# Altium PCB HVBoard_PCB.PcbDoc
Units mm, origin at the board's own origin, x right, y up, seen from the top; angles counter-clockwise.
Board outline 87.12 x 113.79 mm, 2 copper layers (Top Layer, Bottom Layer); 70 components, 37 nets, 201 pads, 10 vias.
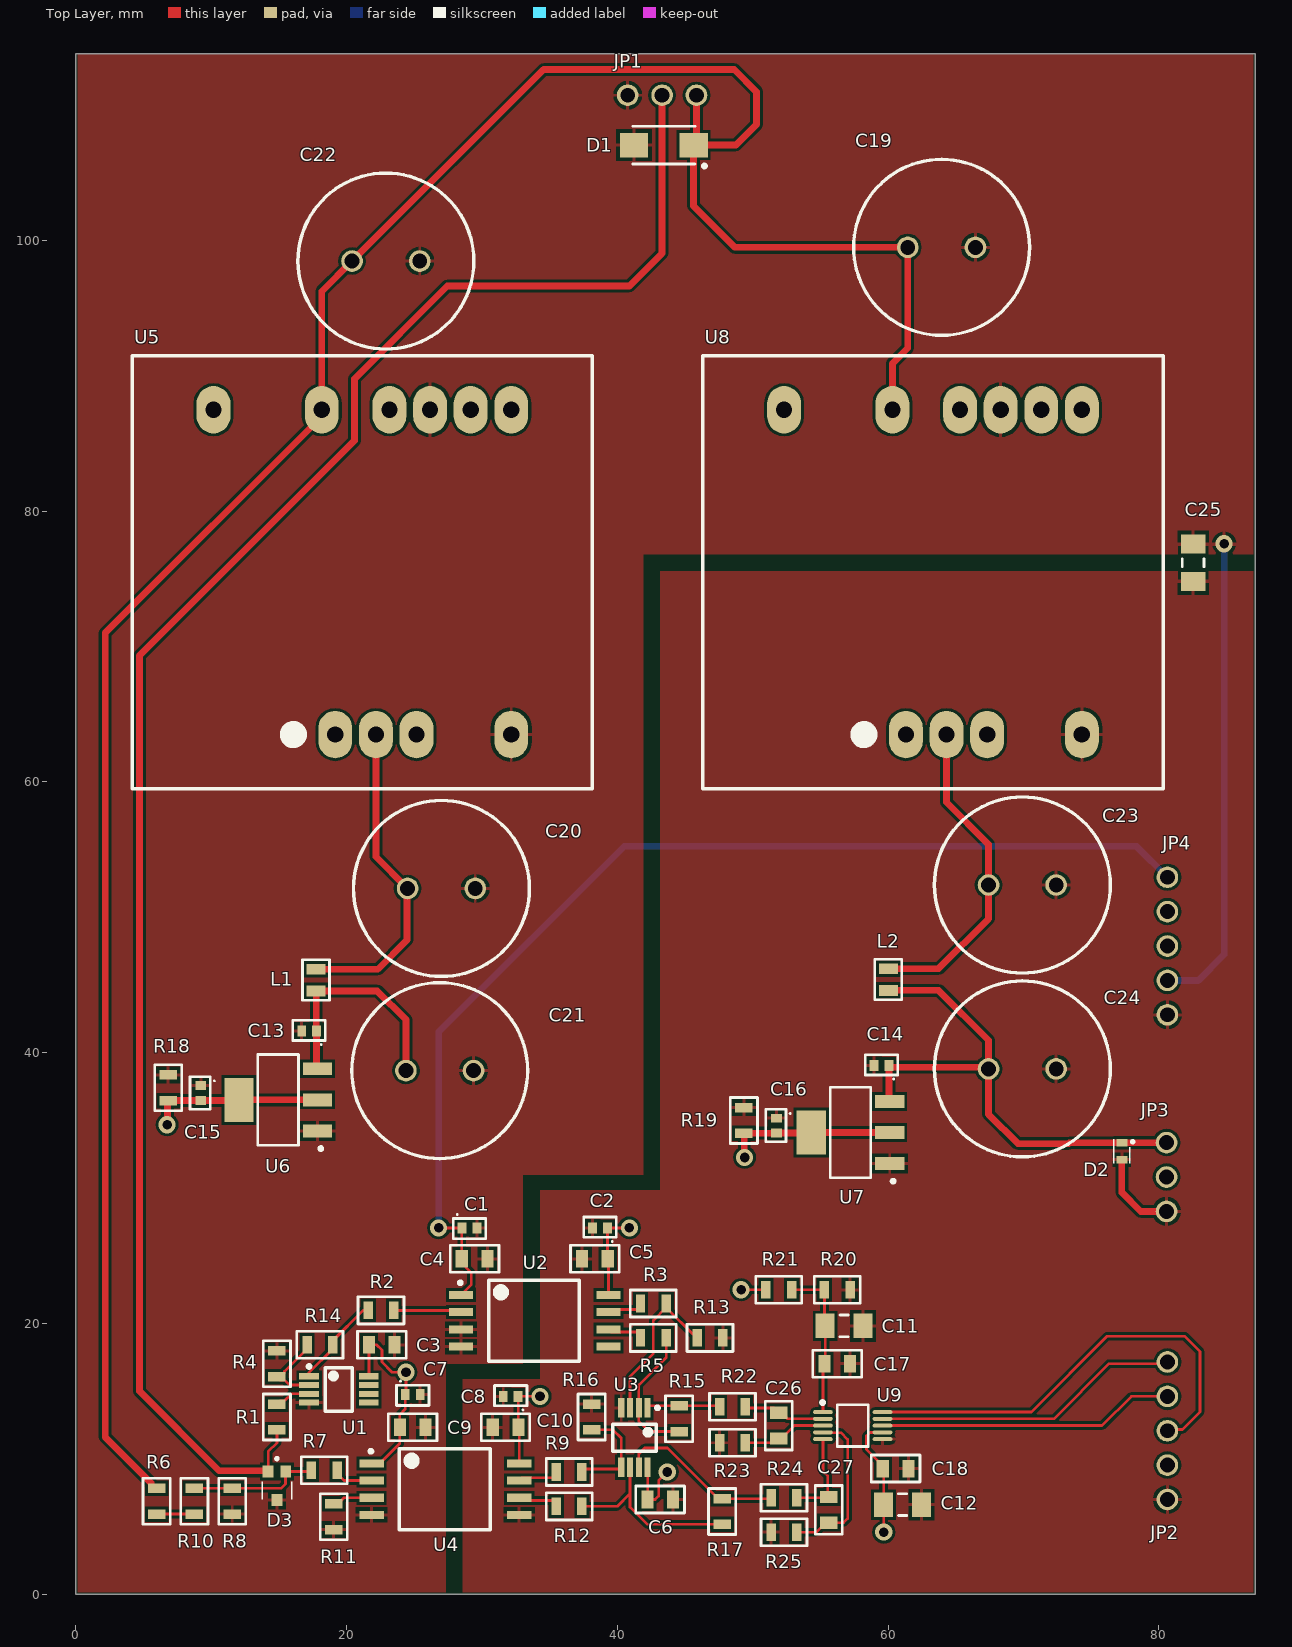
[diagram p0: Top Layer view]
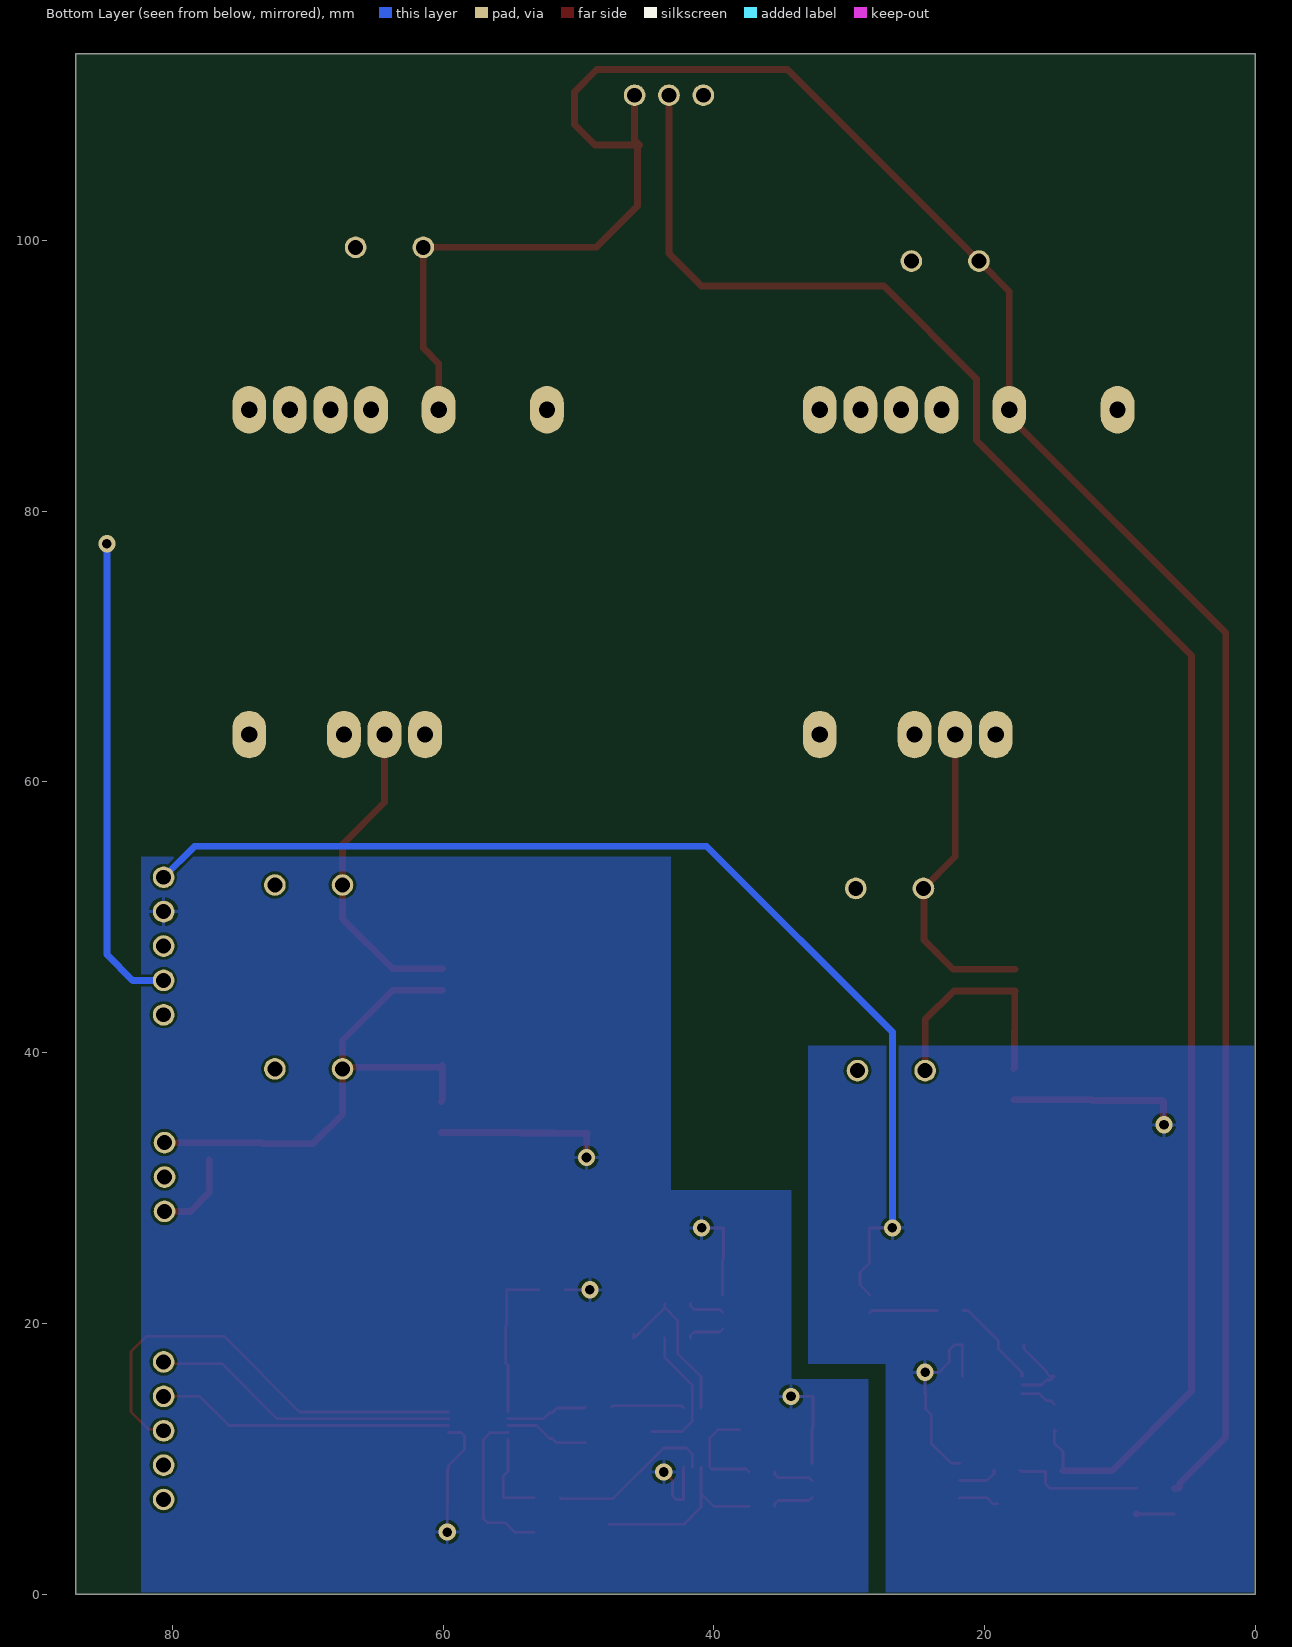
[diagram p1: Bottom Layer view, seen from below]

## Layer stack, top to bottom
Top Solder: solder mask 0.0102, Solder Resist, Dk 3.5
Top Layer: signal copper 0.0356
Dielectric 1: dielectric 0.32, FR-4, Dk 4.8
Bottom Layer: signal copper 0.0356
Bottom Solder: solder mask 0.0102, Solder Resist, Dk 3.5

## Board outline
0,0 0,113.792 87.122,113.792 87.122,0

## Design rules (kind name [scope] priority, off if disabled: settings)
Clearance [All] p1: gap=0.15 ignorepadtopadclearanceinfootprint=FALSE except(0.2: Arc-Fill Arc-Poly Arc-Region Track-Fill Track-Poly Track-Region SMDPad-Fill SMDPad-Poly SMDPad-Region THPad-Fill THPad-Poly THPad-Region Via-Fill Via-Poly Via-Region Fill-Fill Fill-Poly Fill-Region Poly-Poly Poly-Region Region-Region)
MinimumSolderMaskSliver [All] p1: minsoldermaskwidth=0.2
PolygonConnect [All] p1: connectstyle=Relief reliefconductorwidth=0.254 reliefentries=4 polygonreliefangle="90 Angle" airgapwidth=0.254
RoomDefinition VoltageMeasurement [InComponentClass('VoltageMeasurement')] p1 off: confinementstyle=ConfineIn formatcopy=TRUE lockcomponents=FALSE outline 0,0 50.8,0 50.8,25.4 0,25.4
RoomDefinition IsoPowerSupply [InComponentClass('IsoPowerSupply')] p2 off: confinementstyle=ConfineIn formatcopy=TRUE lockcomponents=FALSE outline 88.392,1.524 93.345,1.524 93.345,17.145 88.392,17.145
RoomDefinition CurrentMeasurement [InComponentClass('CurrentMeasurement')] p3 off: confinementstyle=ConfineIn formatcopy=TRUE lockcomponents=FALSE outline 0,0 50.8,0 50.8,25.4 0,25.4
RoutingVias [All] p1: holewidth=0.711 width=1.27 viastyle="Through Hole" minholewidth=0.711 minwidth=1.27 maxholewidth=0.711 maxwidth=1.27
SilkToSolderMaskClearance [IsPad] p1: minsilkscreentomaskgap=0.15 clearancetoexposedcopper=TRUE
SolderMaskExpansion [All] p1: expansion=0.102
Width [All] p1: maxlimit=2 minlimit=0.2 preferedwidth=0.2 minimp=50.000000 maximp=50.000000 favimp=50.000000
28 further rules are at their usual default settings.

## Classes and differential pairs
component class VoltageMeasurement: C7 C8 C9 C10 C27 D3 R6 R7 R8 R9 R10 R11 R12 R16 R17 R24 R25 U4
component class IsoPowerSupply: C13 C14 C15 C16 C19 C20 C21 C22 C23 C24 C25 D2 JP3 JP4 L1 L2 R18 R19 U5 U6 U7 U8
component class CurrentMeasurement: C1 C2 C3 C4 C5 C6 C11 C12 C17 C18 C26 D1 JP1 JP2 R1 R2 R3 R4 R5 R13 R14 R15 R20 R21 R22 R23 U1 U2 U3 U9

## Components (designator, comment, footprint, x,y, rotation, side; value= is the part's Value field where it differs from the comment)
C1 "10uF" TANT_10u 29.072,27.051 r0 top
C2 "10uF" TANT_10u 38.724,27.051 r180 top
C3 "100nF" C0805 22.595,18.415 r0 top
C4 "100nF" C0805 29.453,24.765 r0 top
C5 "100nF" C0805 38.343,24.765 r180 top
C6 "100nF" C0805 43.169,6.985 r0 top
C7 "10uF" TANT_10u 24.881,14.732 r0 top
C8 "10uF" TANT_10u 32.12,14.605 r180 top
C9 "100nF" C0805 24.881,12.319 r0 top
C10 "100nF" C0805 31.739,12.319 r180 top
C11 "10uF" C1206 56.758,19.812 r180 top
C12 "10uF" C1206 61.076,6.604 r0 top
C13 "10uF" TANT_10u 17.225,41.594 r180 top
C14 "10uF" TANT_10u 59.514,39.054 r180 top
C15 "10uF" TANT_10u 9.224,37.022 r270 top
C16 "10uF" TANT_10u 51.767,34.609 r270 top
C17 "100nF" C0805 56.25,17.018 r180 top
C18 "100nF" C0805 60.568,9.271 r0 top
C19 "47uF" "radial cap, 5mm spacing" 63.959,99.506 r180 top
C20 "330uF" "radial cap, 5mm spacing" 27.004,52.135 r180 top
C21 "330uF" "radial cap, 5mm spacing" 26.877,38.673 r180 top
C22 "47uF" "radial cap, 5mm spacing" 22.9,98.49 r180 top
C23 "330uF" "radial cap, 5mm spacing" 69.928,52.389 r180 top
C24 "330uF" "radial cap, 5mm spacing" 69.928,38.8 r180 top
C25 "1nF" C1206 82.55,76.2 r270 top
C26 "470pF" C0805 51.932,12.446 r90 top
C27 "470pF" C0805 55.615,6.223 r90 top
D1 "SMAJ180A" DIODE_TVS 43.434,107.061 r180 top
D2 "ESDA13P70-1U1M" DIODE_TVS_0603 77.278,32.717 r270 top
D3 "DF3A3.3FU(TE85L,F)" DIODE_TVS_2channel 14.848,8.001 r270 top
JP1 "732-5316-ND" 3PIN_HEADER 43.307,110.744 r180 top
JP2 "61300511121" 5PIN_HEADER 80.645,6.985 r90 top
JP3 "732-5316-ND" 3PIN_HEADER 80.58,30.812 r90 top
JP4 "61300511121" 5PIN_HEADER 80.645,42.799 r90 top
L1 "2.2uH" L0805 17.733,45.366 r270 top
L2 "2.2uH" L0805 60.022,45.404 r270 top
R1 "10k" R0805 14.848,13.081 r90 top
R2 "100" R0805 22.534,20.955 r0 top
R3 "10k" R0805 42.661,21.463 r0 top
R4 "10k" R0805 14.848,17.018 r270 top
R5 "10k" R0805 42.661,18.923 r0 top
R6 "360k" R0805 5.958,6.858 r270 top
R7 "100" R0805 18.343,9.144 r0 top
R8 "1k" R0805 11.546,6.858 r90 top
R9 "10k" R0805 36.438,9.017 r0 top
R10 "360k" R0805 8.752,6.858 r90 top
R11 "100" R0805 19.039,5.715 r90 top
R12 "10k" R0805 36.438,6.477 r0 top
R13 "20k" R0805 46.852,18.923 r0 top
R14 "15k" R0805 18.023,18.415 r0 top
R15 "20k" R0805 44.566,12.954 r90 top
R16 "20k" R0805 38.1,13.081 r90 top
R17 "20k" R0805 47.741,6.096 r90 top
R18 "3.3k" R0805 6.811,37.403 r270 top
R19 "3.3k" R0805 49.354,34.99 r270 top
R20 "20k" R0805 56.25,22.479 r180 top
R21 "20k" R0805 51.932,22.479 r180 top
R22 "120" R0805 48.503,13.843 r0 top
R23 "120" R0805 48.503,11.176 r0 top
R24 "120" R0805 52.313,7.112 r0 top
R25 "120" R0805 52.313,4.572 r0 top
U1 "OPA2335AIDGKR" 8-VSSOP-OPA2335AIDGKR 19.42,15.113 r0 top
U2 "AMC1301DWVR" 8-SOIC-AMC1301DWVR 33.898,20.193 r0 top
U3 "OPA2335AIDGKR" 8-VSSOP-OPA2335AIDGKR 41.264,11.557 r270 top
U4 "AMC1301DWVR" 8-SOIC-AMC1301DWVR 27.294,7.747 r0 top
U5 "EPM1210SJ" "14-DIP Module" 21.162,75.503 r270 top
U6 "LM1117MPX-5.0/NOPB" LM1117MPX-5.0/NOPB 14.939,36.514 r180 top
U7 "LM1117MPX-5.0/NOPB" LM1117MPX-5.0/NOPB 57.228,34.101 r180 top
U8 "EPM1210SJ" "14-DIP Module" 63.324,75.503 r270 top
U9 "ADC122S655CIMM/NOPB" 10-VSSOP-ADC122S655CIMM/NOPB 57.393,12.446 r0 top

## Footprints (in the part's own frame and the unit in brackets; to place one, negate y for a bottom-side part, rotate by r counter-clockwise, add the part's x,y. Pads: shape width x height; smd on the part's side, far side on the other; paste and mask are expansions set on the pad)
3PIN_HEADER [mm]
  round 1.6 hole 1.1: 1(-2.54,0) 2(0,0) 3(2.54,0)
  body extent -3.81,-1.27 3.81,1.27, height 9.5
5PIN_HEADER [mm]
  round 1.6 hole 1.1: 1(0,0) 2(2.54,0) 3(5.08,0) 4(7.62,0) 5(10.16,0)
  body extent -1.27,-1.27 11.43,1.27, height 9.5
8-SOIC-AMC1301DWVR [mm]
  rect 1.8x0.6 smd: 1(-5.45,1.905) 2(-5.45,0.635) 3(-5.45,-0.635) 4(-5.45,-1.905) 5(5.45,-1.905) 6(5.45,-0.635) 7(5.45,0.635) 8(5.45,1.905)
  silkscreen extent -5.62,-3 3.3,3, body extent -5.87,-2.92 5.87,2.92, height 2.8
8-VSSOP-OPA2335AIDGKR [mm]
  rect 1.45x0.45 smd: 1(-2.2,0.975) 2(-2.2,0.325) 3(-2.2,-0.325) 4(-2.2,-0.975) 5(2.2,-0.975) 6(2.2,-0.325) 7(2.2,0.325) 8(2.2,0.975)
  silkscreen extent -2.32,-1.6 1,1.82, body extent -2.53,-1.55 2.53,1.55, height 1.09
10-VSSOP-ADC122S655CIMM/NOPB [mm] "ADC"
  oval 1.45x0.3 smd: 1(-2.2,1) 2(-2.2,0.5) 3(-2.2,0) 4(-2.2,-0.5) 5(-2.2,-1) 6(2.2,-1) 7(2.2,-0.5) 8(2.2,0) 9(2.2,0.5) 10(2.2,1)
  silkscreen extent -2.35,-1.55 1.15,1.82, body extent -2.45,-1.55 2.45,1.55, height 1.1
"14-DIP Module" [mm] "DCDC isolated regulator"
  oval 3.5x2.5 hole 1.2: 4(12,-2) 5(12,1) 6(12,4) 7(12,11) 8(-12,11) 9(-12,8) 10(-12,5) 11(-12,2) 12(-12,-3) 14(-12,-11)
  silkscreen extent -16,-17 16,17, body extent -15.5,-16.5 15.5,16.5, height 22.5
C0805 [mm]
  rect 0.9x1.3 smd: 1(-0.95,0) 2(0.95,0)
  silkscreen extent -1.8,-1 1.8,1
C1206 [mm] "Chip Resistor, 2-Leads, Body 3.20x1.60mm, IPC Medium Density"
  rect 1.4x1.8 smd: 1(-1.4,0) 2(1.4,0)
  silkscreen extent -0.3,-0.8 0.3,0.8, body extent -1.75,-0.9 1.75,0.9, height 1.45
DIODE_TVS [mm] "Molded Diode, 2-Leads, Body 4.29x2.59mm, IPC Medium Density"
  rect 2.1x1.8 smd: 1(-2.2,0) 2(2.2,0)
  silkscreen extent -3.13,-1.4 2.3,1.67, body extent -2.52,-1.4 2.52,1.4, height 2.29
DIODE_TVS_2channel [mm]
  rect 0.9x0.8 smd: 1(-1.05,0.65) 2(-1.05,-0.65) 3(1.05,0)
  silkscreen extent -2.1,-1.1 1,1.1
DIODE_TVS_0603 [mm]
  rect 0.55x0.8 smd: 1(-0.625,0) 2(0.625,0)
  silkscreen extent -0.9,-0.6 0.9,0.9
L0805 [mm]
  rect 0.8x1.4 smd: 1(-0.8,0) 2(0.8,0)
  silkscreen extent -1.5,-1 1.5,1
LM1117MPX-5.0/NOPB [mm] "SOT-223-4, LDO"
  rect 2.15x0.95 smd: 1(-2.9,2.3) 2(-2.9,0) 3(-2.9,-2.3)
  rect 2.15x3.25 smd: 4(2.9,0)
  silkscreen extent -3.27,-3.35 1.5,3.72, body extent -1.85,-3.35 1.85,3.35, height 1.63
R0805 [mm]
  rect 0.7x1.3 smd: 1(-0.95,0) 2(0.95,0)
  silkscreen extent -1.7,-1 1.7,1
"radial cap, 5mm spacing" [mm] "5mm lead spacing, 12.5mm dia"
  round 1.6 hole 1.1: 1(-2.5,0) 2(2.5,0)
  silkscreen extent -6.5,-6.5 6.5,6.5, body extent -6.25,-6.25 6.25,6.25, height 21.5
TANT_10u [mm] "DFN, 2-Leads, Body 0.85x1.60mm, Pitch 1.10mm, IPC Medium Density"
  rect 0.65x0.8 smd: 1(-0.55,0) 2(0.55,0)
  silkscreen extent -1.2,-0.8 1.2,1.05, body extent -0.85,-0.43 0.85,0.43, height 0.9

## Part data
C1 C2 C7 C8 C13 C14 C15 C16: library part F381A106MMA, "CAP TANTALUM 10uF, 0603 [1608 Metric], 0.5 ohm, 10 V AVX  Surface Mount Tantalum Capacitor, F38 Series, 10uF, 0603 [1608 Metric], 0.5 ohm, 10 V", Case/Package=0603, Case Code (Metric)=1608, ESR (Equivalent Series Resistance)=500mR, Leakage Current=10uA, Manufacturer="Kyocera AVX", Max Operating Temperature=105°C, Min Operating Temperature=-55°C, Package Quantity=4000, Supplier Part Number 1=478-9527-1-ND, Tolerance=20%, Voltage Rating=10V, Capacitance=10uF, Case Code (Imperial)=0603, ComponentLink1Description=https://datasheet.ciiva.com/48510/f38-48510901.pdf, ComponentLink1URL=https://datasheet.ciiva.com/48510/f38-48510901.pdf, ComponentLink2Description=https://datasheet.ciiva.com/46417/1805432-46417517.pdf, ComponentLink2URL=https://datasheet.ciiva.com/46417/1805432-46417517.pdf, ComponentLink3Description=https://datasheet.ciiva.com/46417/1805432-46417518.pdf, ComponentLink3URL=https://datasheet.ciiva.com/46417/1805432-46417518.pdf, Depth=0.85mm, Dissipation Factor=15%, Height=0.8mm, Height - Seated (Max)=0.035inch, Length=1.6mm, Life (Hours)=1000Hour, Manufacturer Part Number=F381A106MMA, Packaging="Tape and Reel", Pricing 1="1=0.75, 10=0.551, 100=0.3779, 500=0.2992, 1000=0.2519 (USD)", Radiation Hardening=No, REACH SVHC="No SVHC", Stock 1=7989, Supplier 1=Digi-Key, Termination=SMD/SMT, Voltage Rating (DC)=10V, Weight=7.1E-05oz, Width=0.033inch
C3 C4 C5 C6 C9 C10 C17 C18: library part GRM21B7U1A104JA01L, "CAP MLCC 100nF 10Volts U2J 5%", Case/Package=0805, Case Code (Metric)=2012, Dielectric=U2J, Manufacturer=Murata, Max Operating Temperature=125°C, Min Operating Temperature=-55°C, Package Quantity=3000, Supplier Part Number 1=490-11592-6-ND, Tolerance=5%, Voltage Rating=10V, Capacitance=100nF, Case Code (Imperial)=0805, ComponentLink1Description=https://datasheet.ciiva.com/5424/product-5424660.pdf, ComponentLink1URL=https://datasheet.ciiva.com/5424/product-5424660.pdf, ComponentLink2Description=https://datasheet.ciiva.com/17451/product-17451845.pdf, ComponentLink2URL=https://datasheet.ciiva.com/17451/product-17451845.pdf, ComponentLink3Description=https://datasheet.ciiva.com/11618/product-11618924.pdf, ComponentLink3URL=https://datasheet.ciiva.com/11618/product-11618924.pdf, Depth=1.25mm, Height=1.25mm, Length=2mm, Manufacturer Part Number=GRM21B7U1A104JA01L, Mount="Surface Mount", Packaging="Tape and Reel", Pricing 1="1=0.46, 10=0.32, 100=0.192, 500=0.144, 1000=0.1216 (USD)", Radiation Hardening=No, Stock 1=6000, Supplier 1=Digi-Key, Termination=SMD/SMT, Thickness=0.053inch, Voltage Rating (DC)=10V, Width=0.049inch
C11 C12: library part GCJ31CR71A106KA13L, "CAP 10µF ±10% 10V Ceramic Capacitor X7R 1206 (3216 Metric)", Case/Package=1206, Case Code (Metric)=3216, Manufacturer=Murata, Max Operating Temperature=125°C, Min Operating Temperature=-55°C, Package Quantity=2000, Supplier Part Number 1=490-5848-2-ND, Tolerance=10%, Voltage Rating=10V, Capacitance=10uF, ComponentLink1Description=https://www.murata.com/~/media/webrenewal/support/library/catalog/products/capacitor/mlcc/c03e.ashx?la=en-us, ComponentLink1URL=https://www.murata.com/~/media/webrenewal/support/library/catalog/products/capacitor/mlcc/c03e.ashx?la=en-us, Height=1.8mm, Length=3.2mm, Manufacturer Part Number=GCJ31CR71A106KA13L, Mount="Surface Mount", Packaging="Tape and Reel", Radiation Hardening=No, Supplier 1=Digi-Key, Thickness="0.071 inch", Width="0.063 inch"
C19 C22: library part UKL2A470KPD, "CAP  47µF 100V Aluminum Electrolytic Capacitors Radial, Can 2000 Hrs @ 85°C", Case/Package="Radial, can", Manufacturer=Nichicon, Max Operating Temperature=85°C, Min Operating Temperature=-40°C, Package Quantity=1, Supplier Part Number 1=493-14500-ND, Tolerance=10%, Voltage Rating=100V, Capacitance=47uF, ComponentLink1Description=http://nichicon-us.com/english/products/pdfs/e-ukl.pdf, ComponentLink1URL=http://nichicon-us.com/english/products/pdfs/e-ukl.pdf, Manufacturer Part Number=UKL2A470KPD, Mount="Through Hole", Packaging=Bulk, Radiation Hardening=No, Supplier 1=Digi-Key
C20 C21 C23 C24: library part UKL1H331KHD, "CAP 330µF 50V Aluminum Electrolytic Capacitors Radial, Can 2000 Hrs @ 85°C", Case/Package="Radial, can", Manufacturer=Nichicon, Max Operating Temperature=85°C, Min Operating Temperature=-40°C, Package Quantity=1, Supplier Part Number 1=493-15384-ND, Tolerance=10%, Voltage Rating=50V, Capacitance=330uF, ComponentLink1Description=http://nichicon-us.com/english/products/pdfs/e-ukl.pdf, ComponentLink1URL=http://nichicon-us.com/english/products/pdfs/e-ukl.pdf, Manufacturer Part Number=UKL1H331KHD, Mount="Through Hole", Packaging=Bulk, Radiation Hardening=No, Supplier 1=Digi-Key
C25: library part CC1206KKX7RCBB102, "CAP MLCC 1000PF 1KV X7R 1206 Series Comm. Isolation Caps", Case/Package=1206, Case Code (Metric)=3216, Dielectric=X7R, Dielectric Material=Ceramic, Manufacturer=Yageo, Max Operating Temperature=125°C, Min Operating Temperature=-55°C, Package Quantity=1, Supplier Part Number 1=311-1144-1-ND, Tolerance=10%, Voltage Rating=1kV, Capacitance=1nF, Case Code (Imperial)=1206, ComponentLink1Description=https://datasheet.ciiva.com/147/upy-np0x7r-hv-1kv-to-3kv-4-147253.pdf, ComponentLink1URL=https://datasheet.ciiva.com/147/upy-np0x7r-hv-1kv-to-3kv-4-147253.pdf, ComponentLink2Description=https://datasheet.ciiva.com/17435/hv-17435317.pdf, ComponentLink2URL=https://datasheet.ciiva.com/17435/hv-17435317.pdf, ComponentLink3Description=https://datasheet.ciiva.com/11466/hv-11466696.pdf, ComponentLink3URL=https://datasheet.ciiva.com/11466/hv-11466696.pdf, ComponentLink4Description=https://datasheet.ciiva.com/26863/getdatasheetpartid-651408-26863102.pdf, ComponentLink4URL=https://datasheet.ciiva.com/26863/getdatasheetpartid-651408-26863102.pdf, Composition=Ceramic, Depth=1.6mm, Height=1.15mm, Lead Free="Lead Free", Length=3.2mm, Manufacturer Part Number=CC1206KKX7RCBB102, Mount="Surface Mount", Number of Pins=2, Packaging="Tape and Reel", Pricing 1="1=0.15, 10=0.106, 100=0.0501, 500=0.0351, 1000=0.0291 (USD)", Radiation Hardening=No, REACH SVHC="No SVHC", Stock 1=28118, Supplier 1=Digi-Key, Termination=SMD/SMT, Thickness=0.045inch, Voltage Rating (DC)=1kV, Weight=0.000571oz, Width=1.6mm
C26 C27: library part GRM21A7U2E471JW31D, "CAP  470pF ±5% 250V Ceramic Capacitor U2J 0805 (2012 Metric)", Case/Package=0805, Case Code (Metric)=2012, Manufacturer=Murata, Max Operating Temperature=125°C, Min Operating Temperature=-55°C, Package Quantity=2000, Supplier Part Number 1=490-6460-2-ND, Tolerance=5%, Voltage Rating=250V, Capacitance=470pF, Height=1.25mm, Length=2mm, Manufacturer Part Number=GRM21A7U2E471JW31D, Mount="Surface Mount", Packaging="Tape and Reel", Radiation Hardening=No, Supplier 1=Digi-Key, Thickness="0.071 inch", Width="0.063 inch"
D1: "TVS diode 180V, 292V Clamp 1.4A Ipp Tvs Diode Surface Mount DO-214AC (SMA)", Current peak Pulse=1.4A, Manufacturer=MCC, Power peak pulse=400W, Supplier Part Number 1=SMAJ180ALFTR-ND, Voltage - Reverse standoff=180, Voltage breakdown=201V, Voltage Clamping=292V, ComponentLink1Description=https://www.littelfuse.com/~/media/electronics/datasheets/tvs_diodes/littelfuse_tvs_diode_smaj_datasheet.pdf.pdf, ComponentLink1URL=https://www.littelfuse.com/~/media/electronics/datasheets/tvs_diodes/littelfuse_tvs_diode_smaj_datasheet.pdf.pdf, Lead Free="Lead Free", Manufacturer Part Number=SMAJ180A, Mount="Surface Mount", Packaging="Tape and Reel", Supplier 1=Digi-Key, Type=Zener
D2: "TVS diode 12V, 20V Clamp 60A (8/20µs) Ipp Tvs Diode Surface Mount 1610", Current peak Pulse=60A, Manufacturer=STMicroelectronics, Power peak pulse=1300W, Supplier Part Number 1=497-16271-1-ND, Voltage - Reverse standoff=12V, Voltage breakdown=12.5V, Voltage Clamping=20V, ComponentLink1Description=http://www.st.com/content/ccc/resource/technical/document/datasheet/70/53/14/01/33/8d/48/ca/DM00218249.pdf/files/DM00218249.pdf/jcr:content/translations/en.DM00218249.pdf, ComponentLink1URL=http://www.st.com/content/ccc/resource/technical/document/datasheet/70/53/14/01/33/8d/48/ca/DM00218249.pdf/files/DM00218249.pdf/jcr:content/translations/en.DM00218249.pdf, Lead Free="Lead Free", Manufacturer Part Number=ESDA13P70-1U1M, Mount="Surface Mount", Packaging="Tape and Reel", Supplier 1=Digi-Key, Type=Zener
D3: "TVS diode 12V, 20V Clamp 60A (8/20µs) Ipp Tvs Diode Surface Mount 1610", Manufacturer="Toshiba Semiconductor", Supplier Part Number 1=DF3A3.3FU(TE85LF)CT-ND, Voltage - Reverse standoff=1V, Voltage breakdown=3.1V, ComponentLink1Description=https://toshiba.semicon-storage.com/info/docget.jsp?did=22338&prodName=DF3A3.3FU, ComponentLink1URL=https://toshiba.semicon-storage.com/info/docget.jsp?did=22338&prodName=DF3A3.3FU, Lead Free="Lead Free", Manufacturer Part Number=DF3A3.3FU(TE85L,F), Mount="Surface Mount", Packaging="Tape and Reel", Supplier 1=Digi-Key, Type=Zener
JP1 JP3: library part 61300311121, "CONN_HeaderPins3pos WURTH ELEKTRONIK Board-To-Board Connector, Vertical, WR-PHD Series, Through Hole, Header, 3 Contacts, 2.54 mm", Case/Package=100, Colour=Black, Manufacturer="Wurth Electronics", ComponentLink1Description=http://www.farnell.com/cad/1737268.pdf, ComponentLink1URL=http://www.farnell.com/cad/1737268.pdf, Connector Type="Male Pin", Contact Material=Copper, Contact Mating Length=0.236inch, Contact Plating=Gold, Gender=Male, Lead Free="Lead Free", Manufacturer Part Number=61300311121, Mount="Through Hole", Number of Contacts=3, Number of Positions=3, Number of Rows=1, Packaging=Bulk, Pitch=0.1inch, Pricing 1="1=0.13, 10=0.106, 25=0.088, 50=0.074, 100=0.067, 1000=0.061 (USD)", REACH SVHC=Unknown, Stock 1=57026, Supplier 1=Digi-Key, Supplier Part Number 1=732-5316-ND, Termination=Solder
JP2 JP4: "CONN_HeaderPins5pos WURTH ELEKTRONIK         61300511121            Board-To-Board Connector, Vertical, WR-PHD Series, Through Hole, Header, 5 Contacts, 2.54 mm", Colour=Black, Manufacturer="Wurth Electronics", Supplier Part Number 1=732-5318-ND, ComponentLink1Description=http://www.farnell.com/cad/1737268.pdf, ComponentLink1URL=http://www.farnell.com/cad/1737268.pdf, Connector Type="Male Pin", Contact Material=Copper, Contact Mating Length=0.236inch, Contact Plating=Gold, Gender=Male, Lead Free="Lead Free", Manufacturer Part Number=61300511121, Mount="Through Hole", Number of Contacts=5, Number of Positions=5, Number of Rows=1, Packaging=Bulk, Pitch=0.1inch, Pricing 1="1=0.25, 10=0.209, 25=0.174, 50=0.145, 100=0.132, 1000=0.12 (USD)", REACH SVHC=Unknown, Stock 1=13004, Supplier 1=Digi-Key, Termination=Solder
L1 L2: library part DFE201210U-2R2M=P2, "IND 2.2µH Shielded Wirewound Inductor 1.2A 228mOhm Max 0805 (2012 Metric)", Case/Package=0805, Case Code (Metric)=2012, Current Rating=1.2V, Manufacturer=Murata, Manufacturer Part Number=DFE201210U-2R2M=P2, Max Operating Temperature=125°C, Min Operating Temperature=-55°C, Package Quantity=3000, Supplier Part Number 1=490-16592-2-ND, Tolerance=20%, Height=1.25mm, Inductance=2.2uH, Length=2mm, Mount="Surface Mount", Packaging="Tape and Reel", Radiation Hardening=No, Supplier 1=Digi-Key, Thickness="0.071 inch", Width="0.063 inch"
R1 R3 R4 R5 R9 R12: library part RC0805FR-071KL, "RES SMD 10K OHM 1% 1/8W 0805", Case/Package=0805, Manufacturer="Yageo Phycomp", Max Operating Temperature=155°C, Min Operating Temperature=-55°C, Power Rating=125mW, Resistance=1KR, Temperature Coefficient=100ppm/°C, Tolerance=1%, Voltage Rating (DC)=150V, Depth=1.25mm, Height=0.5mm, Lead Free="Lead Free", Length=2mm, Manufacturer Part Number=RC0805FR-071KL, Number of Pins=2, Packaging="Cut Tape", Pricing 1="1=0.1, 10=0.022, 100=0.0088, 1000=0.004, 2500=0.0034 (USD)", REACH SVHC="No SVHC", Stock 1=5527973, Supplier 1=Digi-Key, Width=1.25mm
R2 R7 R11: library part ERA-6AEB101V, "RES SMD 100 OHM 0805 100 Ohm 0.1% 0.125W(1/8W) ±25ppm/C Molded SMD Automotive Punched T/R", Case/Package=0805, Case Code (Metric)=2012, Manufacturer="Panasonic ECG", Manufacturer Part Number=ERA-6AEB102V, Max Operating Temperature=155°C, Max Power Dissipation=125mW, Min Operating Temperature=-55°C, Package Quantity=5000, Resistance=100R, Supplier Part Number 1=P100DATR-ND, Temperature Coefficient=25ppm/°C, Tolerance=0.1%, Voltage Rating=100V, Case Code (Imperial)=0805, ComponentLink1Description=https://industrial.panasonic.com/cdbs/www-data/pdf/RDM0000/AOA0000C307.pdf, ComponentLink1URL=https://industrial.panasonic.com/cdbs/www-data/pdf/RDM0000/AOA0000C307.pdf, Composition="Thin Film", Contact Plating=Tin, Depth=1.25mm, Height=0.5mm, Length=2mm, Military Standard=Not, Mount="Surface Mount", Number of Pins=2, Number of Terminations=2, Packaging="Tape and Reel", Power Rating=125mW, Radiation Hardening=No, REACH SVHC="No SVHC", Supplier 1=Digi-Key, Termination=SMD/SMT, Width=1.25mm
R6 R10: library part ERA-6AEB364V, "RES SMD 360k OHM 0805 360k Ohm 0.1% 0.125W(1/8W) ±25ppm/C Molded SMD Automotive Punched T/R", Case/Package=0805, Case Code (Metric)=2012, Manufacturer="Panasonic ECG", Manufacturer Part Number=ERA-6AEB102V, Max Operating Temperature=155°C, Max Power Dissipation=125mW, Min Operating Temperature=-55°C, Package Quantity=5000, Resistance=360kR, Supplier Part Number 1=P360KDATR-ND, Temperature Coefficient=25ppm/°C, Tolerance=0.1%, Voltage Rating=100V, Case Code (Imperial)=0805, ComponentLink1Description=https://industrial.panasonic.com/cdbs/www-data/pdf/RDM0000/AOA0000C307.pdf, ComponentLink1URL=https://industrial.panasonic.com/cdbs/www-data/pdf/RDM0000/AOA0000C307.pdf, Composition="Thin Film", Contact Plating=Tin, Depth=1.25mm, Height=0.5mm, Length=2mm, Military Standard=Not, Mount="Surface Mount", Number of Pins=2, Number of Terminations=2, Packaging="Tape and Reel", Power Rating=125mW, Radiation Hardening=No, REACH SVHC="No SVHC", Supplier 1=Digi-Key, Termination=SMD/SMT, Width=1.25mm
R8: library part ERA-6AEB102V, "RES SMD 1K OHM 0805 1K Ohm 0.1% 0.125W(1/8W) ±25ppm/C Molded SMD Automotive Punched T/R", Case/Package=0805, Case Code (Metric)=2012, Manufacturer="Panasonic ECG", Max Operating Temperature=155°C, Max Power Dissipation=125mW, Min Operating Temperature=-55°C, Package Quantity=5000, Resistance=1kR, Supplier Part Number 1=P1.0KDACT-ND, Temperature Coefficient=25ppm/°C, Tolerance=0.1%, Voltage Rating=100V, Case Code (Imperial)=0805, ComponentLink1Description=https://datasheet.ciiva.com/11811/0900766b80beefcc-11811155.pdf, ComponentLink1URL=https://datasheet.ciiva.com/11811/0900766b80beefcc-11811155.pdf, ComponentLink2Description=https://datasheet.ciiva.com/30057/54aoa0000ce26-30057591.pdf, ComponentLink2URL=https://datasheet.ciiva.com/30057/54aoa0000ce26-30057591.pdf, ComponentLink3Description=https://datasheet.ciiva.com/48536/era-eng-tds-48536727.pdf, ComponentLink3URL=https://datasheet.ciiva.com/48536/era-eng-tds-48536727.pdf, ComponentLink4Description=https://datasheet.ciiva.com/9198/aoa0000ce26-9198984.pdf, ComponentLink4URL=https://datasheet.ciiva.com/9198/aoa0000ce26-9198984.pdf, ComponentLink5Description=https://datasheet.ciiva.com/16782/70068849-16782808.pdf, ComponentLink5URL=https://datasheet.ciiva.com/16782/70068849-16782808.pdf, ComponentLink6Description=https://datasheet.ciiva.com/24025/aoa0000ce26-197354-24025849.pdf, ComponentLink6URL=https://datasheet.ciiva.com/24025/aoa0000ce26-197354-24025849.pdf, ComponentLink7Description=https://datasheet.ciiva.com/43455/485442-43455257.pdf, ComponentLink7URL=https://datasheet.ciiva.com/43455/485442-43455257.pdf, ComponentLink8Description=https://datasheet.ciiva.com/43457/485442-43457803.pdf, ComponentLink8URL=https://datasheet.ciiva.com/43457/485442-43457803.pdf, ComponentLink9Description=https://datasheet.ciiva.com/7942/485442-7942414.pdf, ComponentLink9URL=https://datasheet.ciiva.com/7942/485442-7942414.pdf, ComponentLink10Description=https://datasheet.ciiva.com/16201/aoa0000ce26-16201486.pdf, ComponentLink10URL=https://datasheet.ciiva.com/16201/aoa0000ce26-16201486.pdf, ComponentLink11Description=https://datasheet.ciiva.com/22783/485442-22783806.pdf, ComponentLink11URL=https://datasheet.ciiva.com/22783/485442-22783806.pdf, ComponentLink12Description=https://datasheet.ciiva.com/7942/485442-7942415.pdf, ComponentLink12URL=https://datasheet.ciiva.com/7942/485442-7942415.pdf, ComponentLink13Description=https://datasheet.ciiva.com/29184/453027-da-01-en-widerstand-0805-era-29184108.pdf, ComponentLink13URL=https://datasheet.ciiva.com/29184/453027-da-01-en-widerstand-0805-era-29184108.pdf, Composition="Thin Film", Contact Plating=Tin, Depth=1.25mm, Height=0.5mm, Length=2mm, Manufacturer Part Number=ERA-6AEB102V, Military Standard=Not, Mount="Surface Mount", Number of Pins=2, Number of Terminations=2, Packaging="Tape and Reel", Power Rating=125mW, Pricing 1="1=0.36, 10=0.302, 100=0.1182, 1000=0.0495, 2500=0.0454 (USD)", Radiation Hardening=No, REACH SVHC="No SVHC", Stock 1=506583, Supplier 1=Digi-Key, Termination=SMD/SMT, Width=1.25mm
R13 R15 R16 R17 R20 R21: library part ERA-6AEB203V, "RES SMD 20K OHM 0805 20K Ohm 0.1% 0.125W(1/8W) ±25ppm/C Molded SMD Automotive Punched T/R", Case/Package=0805, Case Code (Metric)=2012, Manufacturer="Panasonic ECG", Manufacturer Part Number=ERA-6AEB102V, Max Operating Temperature=155°C, Max Power Dissipation=125mW, Min Operating Temperature=-55°C, Package Quantity=5000, Resistance=20kR, Supplier Part Number 1=P20KDATR-ND, Temperature Coefficient=25ppm/°C, Tolerance=0.1%, Voltage Rating=100V, Case Code (Imperial)=0805, ComponentLink1Description=https://industrial.panasonic.com/cdbs/www-data/pdf/RDM0000/AOA0000C307.pdf, ComponentLink1URL=https://industrial.panasonic.com/cdbs/www-data/pdf/RDM0000/AOA0000C307.pdf, Composition="Thin Film", Contact Plating=Tin, Depth=1.25mm, Height=0.5mm, Length=2mm, Military Standard=Not, Mount="Surface Mount", Number of Pins=2, Number of Terminations=2, Packaging="Tape and Reel", Power Rating=125mW, Radiation Hardening=No, REACH SVHC="No SVHC", Supplier 1=Digi-Key, Termination=SMD/SMT, Width=1.25mm
R14: library part ERA-6AEB153V, "RES SMD 15K OHM 0805 15K Ohm 0.1% 0.125W(1/8W) ±25ppm/C Molded SMD Automotive Punched T/R", Case/Package=0805, Case Code (Metric)=2012, Manufacturer="Panasonic ECG", Manufacturer Part Number=ERA-6AEB102V, Max Operating Temperature=155°C, Max Power Dissipation=125mW, Min Operating Temperature=-55°C, Package Quantity=5000, Resistance=15kR, Supplier Part Number 1=P15KDATR-ND, Temperature Coefficient=25ppm/°C, Tolerance=0.1%, Voltage Rating=100V, Case Code (Imperial)=0805, ComponentLink1Description=https://industrial.panasonic.com/cdbs/www-data/pdf/RDM0000/AOA0000C307.pdf, ComponentLink1URL=https://industrial.panasonic.com/cdbs/www-data/pdf/RDM0000/AOA0000C307.pdf, Composition="Thin Film", Contact Plating=Tin, Depth=1.25mm, Height=0.5mm, Length=2mm, Military Standard=Not, Mount="Surface Mount", Number of Pins=2, Number of Terminations=2, Packaging="Tape and Reel", Power Rating=125mW, Radiation Hardening=No, REACH SVHC="No SVHC", Supplier 1=Digi-Key, Termination=SMD/SMT, Width=1.25mm
R18 R19: library part ERA-6AEB332V, "RES SMD 3.3k OHM 0805 3.3k Ohm 0.1% 0.125W(1/8W) ±25ppm/C Molded SMD Automotive Punched T/R", Case/Package=0805, Case Code (Metric)=2012, Manufacturer="Panasonic ECG", Manufacturer Part Number=ERA-6AEB102V, Max Operating Temperature=155°C, Max Power Dissipation=125mW, Min Operating Temperature=-55°C, Package Quantity=5000, Resistance=3.3kR, Supplier Part Number 1=P3.3KDATR-ND, Temperature Coefficient=25ppm/°C, Tolerance=0.1%, Voltage Rating=100V, Case Code (Imperial)=0805, ComponentLink1Description=https://industrial.panasonic.com/cdbs/www-data/pdf/RDM0000/AOA0000C307.pdf, ComponentLink1URL=https://industrial.panasonic.com/cdbs/www-data/pdf/RDM0000/AOA0000C307.pdf, Composition="Thin Film", Contact Plating=Tin, Depth=1.25mm, Height=0.5mm, Length=2mm, Military Standard=Not, Mount="Surface Mount", Number of Pins=2, Number of Terminations=2, Packaging="Tape and Reel", Power Rating=125mW, Radiation Hardening=No, REACH SVHC="No SVHC", Supplier 1=Digi-Key, Termination=SMD/SMT, Width=1.25mm
R22 R23 R24 R25: library part RC0805FR-07120RL, "RES SMD 120 OHM 1% 1/8W 0805", Case/Package=0805, Case Code (Metric)=2012, Manufacturer=Yageo, Max Operating Temperature=155°C, Max Power Dissipation=125mW, Min Operating Temperature=-55°C, Package Quantity=1, Resistance=120R, Supplier Part Number 1=311-120CRCT-ND, Temperature Coefficient=100ppm/°C, Tolerance=1%, Voltage Rating=150V, Case Code (Imperial)=0805, ComponentLink1Description=https://datasheet.ciiva.com/2491/pyu-r-int-thick-7-2491585.pdf, ComponentLink1URL=https://datasheet.ciiva.com/2491/pyu-r-int-thick-7-2491585.pdf, ComponentLink2Description=https://datasheet.ciiva.com/2491/pyu-r-int-thick-7-2491586.pdf, ComponentLink2URL=https://datasheet.ciiva.com/2491/pyu-r-int-thick-7-2491586.pdf, ComponentLink3Description=https://datasheet.ciiva.com/2491/pyu-r-int-thick-7-2491587.pdf, ComponentLink3URL=https://datasheet.ciiva.com/2491/pyu-r-int-thick-7-2491587.pdf, ComponentLink4Description=https://datasheet.ciiva.com/12558/rc0805-257173-12558661.pdf, ComponentLink4URL=https://datasheet.ciiva.com/12558/rc0805-257173-12558661.pdf, ComponentLink5Description=https://datasheet.ciiva.com/11819/0900766b8106beab-11819786.pdf, ComponentLink5URL=https://datasheet.ciiva.com/11819/0900766b8106beab-11819786.pdf, ComponentLink6Description=https://datasheet.ciiva.com/7941/444164-7941691.pdf, ComponentLink6URL=https://datasheet.ciiva.com/7941/444164-7941691.pdf, ComponentLink7Description=https://datasheet.ciiva.com/7941/444164-7941692.pdf, ComponentLink7URL=https://datasheet.ciiva.com/7941/444164-7941692.pdf, ComponentLink8Description=https://datasheet.ciiva.com/16964/rc0805-16964606.pdf, ComponentLink8URL=https://datasheet.ciiva.com/16964/rc0805-16964606.pdf, Composition="Thick Film", Depth=1.25mm, Height=0.5mm, Lead Free="Lead Free", Length=2mm, Manufacturer Part Number=RC0805FR-07120RL, Military Standard=Not, Number of Terminations=2, Packaging="Tape and Reel", Power Rating=125mW, Pricing 1="1=0.1, 10=0.022, 100=0.0088, 1000=0.004, 2500=0.0034 (USD)", REACH SVHC=Unknown, Stock 1=632664, Supplier 1=Digi-Key, Termination=SMD/SMT, Width=0.049inch
U1 U3: "IC OPAMP ZERO-DRIFT 2CIRC 8VSSOP", Case/Package=8-TSSOP, Current - Input Bias="70 pA", Current - Output="50 mA", Current - Supply="570 uA", Manufacturer="Texas Instruments", Operating Temperature="-40C - 125C", Supplier Part Number 1=296-41350-1-ND, Voltage - Input Offset="1 uV", Voltage Supply="2.7-5.5V, +/-1.35 - 2.75", Amplifier Type=Zero-Drift, ComponentLink1Description=http://www.ti.com/general/docs/suppproductinfo.tsp?distId=10&gotoUrl=http%3A%2F%2Fwww.ti.com%2Flit%2Fgpn%2Fopa334, ComponentLink1URL=http://www.ti.com/general/docs/suppproductinfo.tsp?distId=10&gotoUrl=http%3A%2F%2Fwww.ti.com%2Flit%2Fgpn%2Fopa334, Gain Bandwidth Product=2MHz, Manufacturer Part Number=OPA2335AIDGKR, Mounting="Surface Mount", Output Type=Rail-to-Rail, Slew Rate=1.6V/us, Supplier 1=Digi-Key
U2 U4: "IC OPAMP ISOLATION 1 CIRC 8 SOIC", Case/Package=8-SOIC, Current - Input Bias="60 uA", Current - Output="13 mA", Current - Supply="5.9 mA", Manufacturer="Texas Instruments", Operating Temperature="-40C - 125C", Supplier Part Number 1=296-44577-1-ND, Voltage - Input Offset="50 uV", Voltage Supply="3v - 5.5V", Amplifier Type=Isolation, ComponentLink1Description=http://www.ti.com/general/docs/suppproductinfo.tsp?distId=10&gotoUrl=http%3A%2F%2Fwww.ti.com%2Flit%2Fgpn%2Famc1301, ComponentLink1URL=http://www.ti.com/general/docs/suppproductinfo.tsp?distId=10&gotoUrl=http%3A%2F%2Fwww.ti.com%2Flit%2Fgpn%2Famc1301, Gain Bandwidth Product=1MHz, Manufacturer Part Number=AMC1301DWVR, Mounting="Surface Mount", Supplier 1=Digi-Key
U5 U8: "Isolated Module DC DC Converter 1 Output 12V 1A 110V - 450V Input", Case/Package=14-DIP, Current - Output=1A, Manufacturer=Tamura, Operating Temperature="-20C - 80C", Power=12W, Supplier Part Number 1=MT7382-ND, Voltage - Input="110V - 450V", Voltage - Output=12V, Voltage Isolation=3kV, ComponentLink1Description=https://www.tamura-ss.co.jp/en/electronics/pdf/EPM1210SJ_1212AE.pdf, ComponentLink1URL=https://www.tamura-ss.co.jp/en/electronics/pdf/EPM1210SJ_1212AE.pdf, Efficiency=80%, Features="OTP, OCP, OVP", Manufacturer Part Number=EPM1210SJ, Mounting="Through Hole", Supplier 1=Digi-Key, Type="Isolated Module"
U6 U7: "IC REG LINEAR 5V 800MA SOT223-4", Case/Package=SOT-223-4, Current Supply=10mA, Manufacturer="Texas Instruments", Manufacturer Part Number=NKE0503SC, Max Input Voltage=15V, Max Operating Temperature=125°C, Min Operating Temperature=0°C, Output Current=800mA, Output Voltage=5V, Package Quantity=2000, Supplier Part Number 1=LM1117MPX-5.0/NOPBTR-ND, Voltage Dropout Max="1.2V @800mA", ComponentLink1Description=http://www.ti.com/general/docs/suppproductinfo.tsp?distId=10&gotoUrl=http%3A%2F%2Fwww.ti.com%2Flit%2Fgpn%2Flm1117, ComponentLink1URL=http://www.ti.com/general/docs/suppproductinfo.tsp?distId=10&gotoUrl=http%3A%2F%2Fwww.ti.com%2Flit%2Fgpn%2Flm1117, Mount="Surface Mount", Number of Outputs=1, Number of Pins=4, Packaging="Tape Real", Supplier 1=Digi-Key
U9: "12 Bit Analog to Digital Converter 2 Input 2 SAR 10-VSSOP", Manufacturer="Texas Instruments", Operation temp=-40C-105C, Package=10-VSSOP, Supplier Part Number 1=296-41405-1-ND, Voltage Supply Analog=5V, Architecture=SAR, ComponentLink1Description=http://www.ti.com/general/docs/suppproductinfo.tsp?distId=10&gotoUrl=http%3A%2F%2Fwww.ti.com%2Flit%2Fgpn%2Fadc122s655, ComponentLink1URL=http://www.ti.com/general/docs/suppproductinfo.tsp?distId=10&gotoUrl=http%3A%2F%2Fwww.ti.com%2Flit%2Fgpn%2Fadc122s655, Configuration=S/H-ADC, Data Interface="SPI, DSP", Features="Simultaneous sampling", Input type="Differential, Single Ended", Manufacturer Part Number=ADC122S655CIMM/NOPB, Mounting="Surface Mount", Number of A/D Converters=2, Number of Bits=12, Number of Inputs=2, Ratio=1:1, Reference Type=External, Sampleing Rate=500k, Supplier 1=Digi-Key, Voltage Supply Digital=5V

## Via types
v1: diameter 1.27, hole 0.711, Top Layer to Bottom Layer, 10 vias

## Nets (pads, with @x,y where several pads share a name; then routed paths per layer and width w, separated by ;. In a path a pad name is that pad's centre, name@x,y a point inside that pad or via, vN(x,y) a via of type N, cw(c..) or ccw(c..) an arc to the next point about the centre after c; other vN are vias at no path point)
+5-HV: C1.1 C3.1 C4.1 C7.1 C9.1 C15.2 JP4.5 R18.2 U1.8 U2.1 U4.1 U6.2 U6.4 | length 109.7
  Top Layer w0.2: U1.8 21.645,16.113 C3.1 22.225,18.415 22.606,18.034 22.606,17.145 23.368,16.383 v1(24.384,16.383) 24.384,14.785 C7.1 24.331,13.669 23.931,13.269 C9.1 23.931,11.139 22.444,9.652 U4.1 ; v1(26.797,27.051) C1.1 28.503,27.032 C4.1 28.503,24.445 29.199,23.749 29.199,22.849 U2.1
  Top Layer w0.5: v1(6.731,34.671) 6.771,34.711 6.771,36.413 R18.2 6.821,36.463 9.215,36.463 C15.2 11.997,36.472 U6.4 U6.2
  Bottom Layer w0.5: v1(26.797,27.051) 26.797,41.529 40.513,55.245 78.359,55.245 JP4.5
+5-LV: C2.1 C5.1 C6.1 C8.1 C10.1 C12.1 C16.2 C18.1 JP4.4 R19.2 R21.2 U2.8 U3.8 U4.8 U7.2 U7.4 U9.7 | length 41.9
  Top Layer w0.2: U4.8 32.744,12.264 C10.1 32.67,12.338 C8.1 v1(34.29,14.605) ; U2.8 39.348,24.71 C5.1 39.274,24.784 C2.1 v1(40.894,27.051) ; U3.8 42.239,7.005 C6.1 42.799,6.985 43.053,7.239 43.053,8.382 v1(43.688,9.017) ; v1(49.149,22.479) R21.2 ; U9.7 59.585,11.938 58.663,11.938 58.409,11.684 58.409,10.68 59.618,9.471 C18.1 59.676,9.213 C12.1 59.69,6.59 v1(59.69,4.572)
  Top Layer w0.5: v1(49.403,32.258) 49.379,32.282 49.379,34.015 R19.2 49.364,34.05 51.758,34.05 C16.2 54.286,34.059 U7.4 U7.2
+12: C14.1 C24.2 D2.1 JP3.3 L2.2 U7.3 | length 38.6
  Top Layer w0.5: L2.2 63.743,44.604 67.428,40.919 C24.2 ; C14.1 C14.1@60.064,39.002 ; U7.3 60.064,36.465 C14.1@60.064,39.002 ; JP3.3 80.575,33.347 77.283,33.347 D2.1 73.408,33.342 73.34,33.274 69.596,33.274 67.428,35.442 C24.2 ; C14.1@60.064,39.002 60.139,38.927 67.301,38.927 C24.2
GND-HV: C1.2 C3.2 C4.2 C7.2 C9.2 C13.2 C15.1 C19.1 C20.1 C21.1 C22.1 C25.1 D1.2 D3.3 JP1.3 JP4.2 R4.1 R8.1 R11.1 R18.1 U1.4 U2.3 U2.4 U4.4 U5.7 U5.10 U6.1 U8.10 | length 35.3
  Bottom Layer w0.5: JP4.2 82.931,45.339 84.836,47.244 v1(84.836,77.597)
GND-LV: C2.2 C5.2 C6.2 C8.2 C10.2 C11.1 C12.2 C14.2 C16.1 C17.1 C18.2 C23.1 C24.1 C25.2 D2.2 JP2.1 JP3.1 JP4.1 R13.2 R16.2 R19.1 R20.1 R23.1 R25.1 U3.4 U4.5 U7.1 U8.7 U9.6 | length 6.3
  Top Layer w0.5: D2.2 77.278,29.669 78.675,28.272 JP3.1
GND_LV: U2.5
NetC11_2: C11.2 C17.2 R20.2 R21.1 U9.1 | length 11.5
  Top Layer w0.2: R21.1 R20.2 55.3,19.87 C11.2 55.358,17.076 C17.2 55.193,16.911 U9.1
NetC13_1: C13.1 C21.2 L1.2 U6.3 | length 17.1
  Top Layer w0.5: U6.3 17.775,38.878 C13.1 17.754,41.615 17.754,44.545 L1.2 22.254,44.566 24.377,42.443 C21.2
NetC19_2: C19.2 C22.2 D1.1 JP1.1 R6.1 U5.12 U8.12 | length 182.2
  Top Layer w0.5: R6.1 5.658,7.808 5.558,7.908 5.558,8.208 2.159,11.607 2.159,71 18.162,87.003 U5.12 18.162,96.252 C22.2 34.559,112.649 48.641,112.649 50.292,110.998 50.292,108.585 48.768,107.061 D1.1 ; JP1.1 45.847,107.424 45.484,107.061 D1.1 ; U8.12 60.324,90.931 61.459,92.066 C19.2 48.685,99.506 45.634,102.557 D1.1
NetC20_2: C20.2 L1.1 U5.5 | length 23.8
  Top Layer w0.5: L1.1 22.305,46.166 24.464,48.325 24.464,52.175 22.162,54.477 U5.5
NetC23_2: C23.2 L2.1 U8.5 | length 23.8
  Top Layer w0.5: L2.1 63.743,46.204 67.428,49.889 C23.2 67.428,55.397 64.324,58.501 U8.5
NetC26_1: C26.1 R23.2 U9.3 | length 6.3
  Top Layer w0.2: R23.2 51.612,11.176 C26.1 52.132,11.496 53.082,12.446 U9.3
NetC26_2: C26.2 R22.2 U9.2 | length 6.1
  Top Layer w0.2: R22.2 49.55,13.746 51.582,13.746 C26.2 52.136,13.396 52.578,12.954 55.185,12.954 U9.2
NetC27_1: C27.1 R25.2 U9.4 | length 12.1
  Top Layer w0.2: R25.2 54.714,4.572 55.415,5.273 C27.1 56.708,5.273 57.023,5.588 57.023,11.43 56.526,11.927 55.212,11.927 U9.4
NetC27_2: C27.2 R24.2 U9.5 | length 6.8
  Top Layer w0.2: R24.2 55.554,7.112 55.554,8.708 55.193,9.069 U9.5
NetD3_1: D3.1 R7.1 R8.2 R10.2 | length 9.7
  Top Layer w0.2: R10.2 R8.2 15.163,7.808 15.483,8.128 15.483,9.036 D3.1 17.3,9.051 R7.1
NetD3_2: D3.2 JP1.2 R1.1 | length 135.1
  Top Layer w0.2: D3.2 14.198,9.101 14.198,10.515 14.848,11.165 14.848,12.035 R1.1 R1.1@14.752,12.035
  Top Layer w0.5: D3.2@14.198,9.101 10.584,9.101 4.699,14.986 4.699,69.342 20.574,85.217 20.574,89.789 27.432,96.647 40.894,96.647 43.307,99.06 JP1.2
NetJP2_3: JP2.3 U9.10 | length 33.7
  Top Layer w0.2: U9.10 70.596,13.446 76.2,19.05 81.915,19.05 83.058,17.907 83.058,13.462 81.745,12.149 80.729,12.149 JP2.3
NetJP2_4: JP2.4 U9.8 | length 21.9
  Top Layer w0.2: U9.8 75.819,12.446 77.978,14.605 JP2.4
NetJP2_5: JP2.5 U9.9 | length 22.8
  Top Layer w0.2: U9.9 72.255,12.946 76.327,17.018 80.518,17.018 JP2.5
NetR1_2: R1.2 U1.3 | length 2.7
  Top Layer w0.2: R1.2 15.098,14.281 15.413,14.281 15.92,14.788 U1.3
NetR2_1: R2.1 R14.2 U1.1 | length 6.9
  Top Layer w0.2: U1.1 17.22,16.362 18.973,18.115 R14.2 18.973,18.715 21.213,20.955 R2.1
NetR2_2: R2.2 U2.2 | length 5
  Top Layer w0.2: R2.2 28.321,20.955 U2.2
NetR3_1: R3.1 U2.7 | length 2.7
  Top Layer w0.2: U2.7 39.548,21.028 41.461,21.028 41.711,21.278 R3.1
NetR3_2: R3.2 R13.1 U3.3 | length 12.4
  Top Layer w0.2: U3.3 40.939,16.058 42.661,17.78 42.661,20.213 R3.2@43.611,21.163 ; R3.2 R3.2@43.611,21.163 ; R13.1 45.902,19.223 45.752,19.073 45.726,19.048 R3.2@43.611,21.163
NetR4_2: R4.2 R14.1 U1.2 | length 6.1
  Top Layer w0.2: R14.1 17.073,18.115 15.398,16.44 15.398,16.318 15.148,16.068 R4.2 15.098,15.818 15.413,15.818 15.793,15.438 U1.2
NetR5_1: R5.1 U2.6 | length 2.7
  Top Layer w0.2: U2.6 39.548,19.358 41.461,19.358 41.711,19.108 R5.1
NetR5_2: R5.2 R15.1 U3.2 | length 10.3
  Top Layer w0.2: R5.2 43.611,17.46 41.589,15.438 U3.2 41.589,12.756 42.341,12.004 R15.1
NetR6_2: R6.2 R10.1 | length 2.8
  Top Layer w0.2: R6.2 R10.1
NetR7_2: R7.2 U4.2 | length 3
  Top Layer w0.2: R7.2 19.293,8.89 19.801,8.382 U4.2
NetR9_1: R9.1 U4.7 | length 3.1
  Top Layer w0.2: U4.7 32.944,8.582 35.238,8.582 35.488,8.832 R9.1
NetR9_2: R9.2 R16.1 U3.5 | length 7.7
  Top Layer w0.2: R9.2 37.603,9.232 40.164,9.232 U3.5 40.289,11.527 39.685,12.131 R16.1
NetR11_2: R11.2 U4.3 | length 3
  Top Layer w0.2: R11.2 19.354,6.665 19.801,7.112 U4.3
NetR12_1: R12.1 U4.6 | length 3.1
  Top Layer w0.2: U4.6 32.944,6.912 35.238,6.912 35.488,6.662 R12.1
NetR12_2: R12.2 R17.1 U3.6 | length 14.2
  Top Layer w0.2: R12.2 39.994,6.477 40.939,7.422 ; U3.6 40.939,7.422 ; R17.1 42.214,5.146 40.939,6.421 40.939,7.422
NetR15_2: R15.2 R22.1 U3.1 | length 5.4
  Top Layer w0.2: U3.1 42.239,13.779 42.364,13.904 R15.2 47.492,13.904 R22.1
NetR17_2: R17.2 R24.1 U3.7 | length 12.5
  Top Layer w0.2: U3.7 41.589,10.358 42.026,10.795 43.692,10.795 47.441,7.046 R17.2 51.297,7.046 R24.1
pads on no net: JP2.2 JP3.2 JP4.3 U1.5 U1.6 U1.7 U5.4 U5.6 U5.8 U5.9 U5.11 U5.14 U8.4 U8.6 U8.8 U8.9 U8.11 U8.14

## Polygon pours and split planes (outlines as drawn)
GND-HV on Top Layer "GND-HV_L01_P003" (solid, pour order 3): 0.127,113.792 0.127,0.127 27.305,0.127 27.305,17.018 33.02,17.018 33.02,30.988 41.91,30.988 41.91,76.835 86.995,76.835 86.995,113.792
GND-LV on Top Layer "GND-LV_L01_P001" (solid, pour order 1): 86.995,75.57 43.18,75.57 43.18,29.845 34.29,29.845 34.29,15.875 28.575,15.875 28.575,0.127 86.995,0.127
+5-LV on Bottom Layer "+5-LV_L02_P007" (solid, pour order 7): 28.575,0.125 28.575,15.875 34.281,15.875 34.281,29.836 43.18,29.836 43.18,54.483 82.296,54.483 82.296,0.128
+5-HV on Bottom Layer "+5-HV_L02_P005" (solid, pour order 5): 0.114,40.513 33.02,40.513 33.02,17.018 27.305,17.018 27.305,0.127 0.114,0.127

## Silkscreen, mask and mechanical layers (free items; w line width, h text height)
Board Outline:
  the board outline again, w0.254